# Altium PCB Battery charger.PcbDoc
Units mm, origin at the board's own origin, x right, y up, seen from the top; angles counter-clockwise.
Board outline 33 x 10 mm, 2 copper layers (Top Layer, Bottom Layer); 22 components, 12 nets, 51 pads, 29 vias.
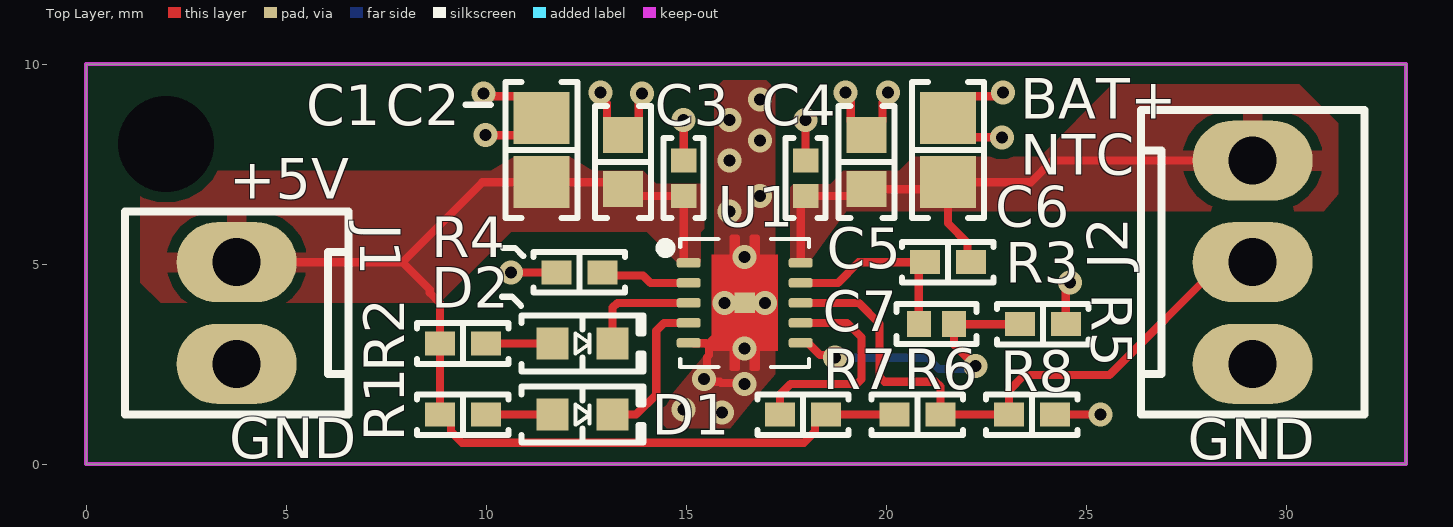
[diagram p0: Top Layer view]
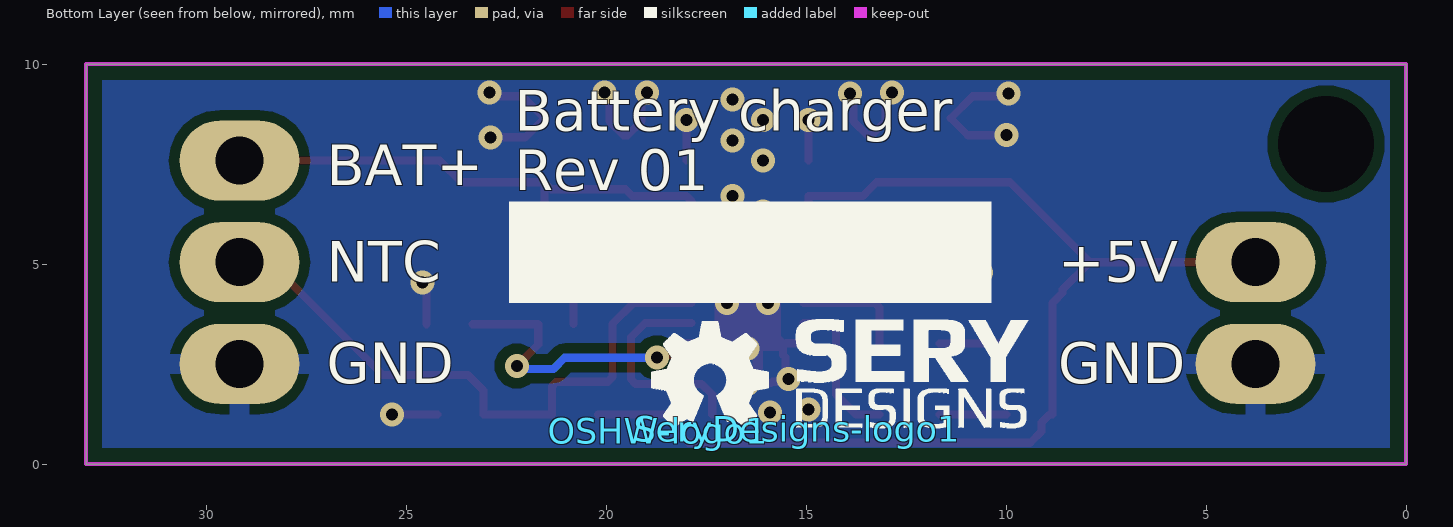
[diagram p1: Bottom Layer view, seen from below]

## Layer stack, top to bottom
Top Solder: solder mask 0.0102, Solder Resist, Dk 3.5
Top Layer: signal copper 0.0356
Dielectric 1: dielectric 0.32, FR-4, Dk 4.8
Bottom Layer: signal copper 0.0356
Bottom Solder: solder mask 0.0102, Solder Resist, Dk 3.5

## Board outline
0,0 0,10 33,10 33,0

## Design rules (kind name [scope] priority, off if disabled: settings)
BoardOutlineClearance [All] p1: gap=0.4 ignorepadtopadclearanceinfootprint=FALSE
Clearance [All] p1: gap=0.254 ignorepadtopadclearanceinfootprint=FALSE except(0: SMDPad-Hole THPad-Hole Via-Hole Fill-Hole Poly-Hole Region-Hole Text-Hole; 0.127: SMDPad-SMDPad; 0.2: Arc-SMDPad Arc-THPad Track-SMDPad Track-THPad; 0.5: SMDPad-THPad THPad-THPad THPad-Via)
HoleSize [All] p1: absolutevalues=TRUE maxlimit=2.54 minlimit=0.3 maxpercent=80.000 minpercent=20.000
HoleToHoleClearance [All] p1: gap=0.5 allowstackedmicrovias=TRUE
MinimumAnnularRing [All] p1: minimumring=0.13
MinimumSolderMaskSliver [All] p1: minsoldermaskwidth=0.12
PolygonConnect [All] p1: connectstyle=Relief reliefconductorwidth=0.254 reliefentries=4 polygonreliefangle="90 Angle" airgapwidth=0.254
RoutingVias [All] p1: holewidth=0.3 width=0.6 viastyle="Through Hole" minholewidth=0.3 minwidth=0.5 maxholewidth=0.6 maxwidth=1
SilkToSilkClearance [All] p1: silktosilkclearance=0
SilkToSolderMaskClearance [IsPad] p1: minsilkscreentomaskgap=0.05 clearancetoexposedcopper=TRUE
SolderMaskExpansion [All] p1: expansion=0.05 istentingtop=FALSE
Width [All] p1: maxlimit=1.016 minlimit=0.127 preferedwidth=0.203
25 further rules are at their usual default settings.

## Components (designator, comment, footprint, x,y, rotation, side; value= is the part's Value field where it differs from the comment)
C1 "10 µF" "CAP 0805_2012" 11.385,7.847 r270 top locked
C2 "1 µF" "CAP 0603_1608" 13.417,7.547 r270 top locked
C3 "0.1 µF" "CAP 0402_1005" 14.941,7.147 r270 top locked
C4 "0.1 µF" "CAP 0402_1005" 17.989,7.147 r270 top locked
C5 "1 µF" "CAP 0603_1608" 19.513,7.547 r270 top locked
C6 "10 µF" "CAP 0805_2012" 21.545,7.847 r270 top locked
C7 "0.47 µF" "CAP 0402_1005" 21.257,3.503 r180 top locked
D1 "Green" "LED 0603_1608 GREEN" 12.413,1.237 r0 top locked (schematic designator LED1)
D2 "Red" "LED 0603_1608 RED" 12.413,3.015 r0 top locked (schematic designator LED2)
J1 "0022272021" "MOLEX KK 0022272021" 3.765,3.777 r90 top locked
J2 "0022272031" "MOLEX KK 0022272031" 29.165,5.047 r270 top locked
OSHW-logo1 "OSHW-logo" OSHW-logo 18.7,0.831 r180 bottom
R1 "1k" "RES 0402_1005" 9.42,1.237 r180 top locked
R2 "1k" "RES 0402_1005" 9.42,3.015 r180 top locked
R3 "220R" "RES 0402_1005" 21.545,5.047 r0 top locked
R4 "49.9k" "RES 0402_1005" 12.334,4.793 r0 top locked
R5 "1k" "RES 0402_1005" 23.916,3.498 r180 top locked
R6 "10k" "RES 0402_1005" 20.783,1.237 r0 top locked
R7 "10k" "RES 0402_1005" 17.922,1.237 r0 top locked
R8 "10k" "RES 0402_1005" 23.644,1.237 r0 top locked
SeryDesigns-logo1 "SeryDesigns-logo" SeryDesigns-logo 15.22,0.881 r180 bottom
U1 "BQ24060" BQ24060-VSON 16.465,4.031 r0 top locked

## Footprints (in the part's own frame and the unit in brackets; to place one, negate y for a bottom-side part, rotate by r counter-clockwise, add the part's x,y. Pads: shape width x height; smd on the part's side, far side on the other; paste and mask are expansions set on the pad)
BQ24060-VSON [mm]
  rrect50% 0.6x0.24 smd mask+0.07: 1(-1.4,1) 2(-1.4,0.5) 3(-1.4,0) 4(-1.4,-0.5) 5(-1.4,-1) 6(1.4,-1) 7(1.4,-0.5) 8(1.4,0) 9(1.4,0.5) 10(1.4,1)
  rect 0.508x0.508 smd paste-2.54 mask-2.54: 11(0,0)
  Top Layer region: -0.375,-1.636 -0.375,-1.2 -0.825,-1.2 -0.825,1.2 -0.375,1.2 -0.375,1.639 -0.375,1.645 -0.373,1.656 -0.368,1.666 -0.362,1.676 -0.358,1.68 -0.358,1.68 -0.355,1.683 -0.351,1.687 -0.342,1.693 -0.331,1.698 -0.319,1.7 -0.314,1.7 -0.314,1.7 -0.188,1.7 -0.182,1.7 -0.17,1.698 -0.159,1.693 -0.148,1.686 -0.144,1.682 -0.144,1.682 -0.14,1.678 -0.137,1.674 -0.131,1.666 -0.127,1.657 -0.125,1.647 -0.125,1.642 -0.125,1.642 -0.125,1.2 0.125,1.2 0.125,1.639 0.125,1.645 0.127,1.656 0.132,1.666 0.138,1.676 0.142,1.68 0.142,1.68 0.146,1.684 0.15,1.688 0.159,1.694 0.169,1.698 0.179,1.7 0.184,1.7 0.184,1.7 0.185,1.7 0.185,1.7 0.312,1.7 0.318,1.7 0.33,1.698 0.342,1.693 0.352,1.686 0.356,1.682 0.361,1.677 0.368,1.667 0.373,1.655 0.375,1.643 0.375,1.637 0.375,1.637 0.375,1.2 0.825,1.2 0.825,1.2 0.825,-1.2 0.375,-1.2 0.375,-1.634 0.375,-1.641 0.372,-1.654 0.367,-1.667 0.359,-1.679 0.354,-1.683 0.354,-1.683 0.354,-1.684 0.35,-1.688 0.341,-1.694 0.331,-1.698 0.32,-1.7 0.315,-1.7 0.315,-1.7 0.185,-1.7 0.179,-1.7 0.169,-1.698 0.158,-1.694 0.149,-1.688 0.146,-1.684 0.146,-1.684 0.141,-1.68 0.137,-1.676 0.131,-1.667 0.127,-1.656 0.125,-1.646 0.125,-1.64 0.125,-1.64 0.126,-1.2 -0.125,-1.199 -0.125,-1.639 -0.125,-1.645 -0.127,-1.656 -0.132,-1.667 -0.138,-1.677 -0.142,-1.681 -0.147,-1.685 -0.158,-1.693 -0.17,-1.697 -0.182,-1.7 -0.189,-1.7 -0.189,-1.7 -0.313,-1.7 -0.319,-1.7 -0.331,-1.698 -0.342,-1.693 -0.352,-1.687 -0.356,-1.682 -0.361,-1.678 -0.368,-1.667 -0.373,-1.655 -0.375,-1.643 -0.375,-1.636
  silkscreen extent -2.11,-1.6 1.61,1.6, body extent -1.5,-1.5 1.5,1.5, height 1
"CAP 0402_1005" [mm] "Chip Capacitor, 2-Leads, Body 1.02x0.51mm, IPC Medium Density"
  rect 0.6x0.64 smd: 1(-0.44,0) 2(0.44,0)
  silkscreen extent -1,-0.5 1,0.5, body extent -0.5,-0.26 0.5,0.26, height 0.52
"CAP 0603_1608" [mm] "Chip Capacitor, 2-Leads, Body 1.60x0.80mm, IPC Medium Density"
  rect 0.9x1 smd: 1(-0.675,0) 2(0.675,0)
  silkscreen extent -1.4,-0.7 1.4,0.7, body extent -0.8,-0.41 0.8,0.41, height 0.82
"CAP 0805_2012" [mm] "Chip Capacitor, 2-Leads, Body 2.00x1.20mm, IPC Medium Density"
  rect 1.3x1.4 smd: 1(-0.8,0) 2(0.8,0)
  silkscreen extent -1.7,-0.9 1.7,0.9, body extent -1,-0.64 1,0.64, height 1.26
"LED 0603_1608 GREEN" [mm] "Chip Diode, 2-Leads, Body 1.60x0.80mm, IPC Medium Density"
  rect 0.8x0.8 smd: 1(-0.75,0) 2(0.75,0)
  silkscreen extent -1.52,-0.7 1.52,0.7, body extent -0.8,-0.4 0.8,0.4, height 0.53
"LED 0603_1608 RED" [mm] "Chip Diode, 2-Leads, Body 1.60x0.80mm, IPC Medium Density"
  rect 0.8x0.8 smd: 1(-0.75,0) 2(0.75,0)
  silkscreen extent -1.52,-0.7 1.52,0.7, body extent -0.8,-0.4 0.8,0.4, height 0.53
"MOLEX KK 0022272021" [mm]
  oval 2x3 hole 1.2: 1(-1.27,0) 2(1.27,0)
  silkscreen extent -2.54,-2.79 2.54,2.79, body extent -2.54,-2.9 2.54,2.9, height 11.7
"MOLEX KK 0022272031" [mm]
  oval 2x3 hole 1.2: 1(-2.54,0) 2(0,0) 3(2.54,0)
  silkscreen extent -3.81,-2.79 3.81,2.79, body extent -3.81,-2.9 3.81,2.9, height 11.7
OSHW-logo [mm] "OSHW logo, no writing"
  silkscreen extent -0.17,0.1 2.77,2.74
"RES 0402_1005" [mm] "Chip Resistor, 2-Leads, Body 1.0x0.5mm, IPC Medium Density"
  rect 0.75x0.6 smd: 1(-0.575,0) 2(0.575,0)
  silkscreen extent -1.14,-0.51 1.14,0.51, body extent -0.5,-0.25 0.5,0.25, height 0.35
SeryDesigns-logo [mm] "Sery designs logo"
  silkscreen extent -0.04,0.02 5.77,2.74

## Part data
C1 C6: library part GRM21BR61H106ME43L, "CAP CER 10UF 50V X5R 0805", Device Package="0805 (2012 Metric)", manufacturer="Murata Electronics", Operating Temperature="-55°C ~ 85°C", Supplier Part Number 1=490-18664-1-ND, Temperature Coefficient=X5R, Tolerance=±20%, Voltage - Rated=50V, Applications="General Purpose", Capacitance="10 µF", componentlink1description=Datasheet, componentlink1url=https://search.murata.co.jp/Ceramy/image/img/A01X/G101/ENG/GRM21BR61H106ME43-01A.pdf, componentlink2description="DigiKey Link", componentlink2url=https://www.digikey.com/en/products/detail/murata-electronics/GRM21BR61H106ME43L/10326317, lastupdated="9/19/2022 1:04:12 PM", Lifecycle Status=Active, Minimum Order=1, Mounting Type="Surface Mount, MLCC", Package / Case="0805 (2012 Metric)", packaging=TapeAndReel, Part Number=GRM21BR61H106ME43L, Part Status=Active, partid=41295, price=0.08, series=GRM, Size / Dimension="0.079\" L x 0.049\" W (2.00mm x 1.25mm)", Supplier 1=DigiKey, Thickness (Max)="0.057\" (1.45mm)"
C2 C5: library part UMK107AB7105KA-T, "CAP CER 1UF 50V X7R 0603", Device Package="0603 (1608 Metric)", manufacturer="Taiyo Yuden", Operating Temperature="-55°C ~ 125°C", Supplier Part Number 1=587-3247-1-ND, Temperature Coefficient=X7R, Tolerance=±10%, Voltage - Rated=50V, Applications="SMPS Filtering", Capacitance="1 µF", componentlink1description=Datasheet, componentlink1url=https://www.yuden.co.jp/productdata/catalog/mlcc01_e.pdf, componentlink2description="DigiKey Link", componentlink2url=https://www.digikey.com/en/products/detail/taiyo-yuden/UMK107AB7105KA-T/3660085, lastupdated="9/19/2022 1:00:51 PM", Lifecycle Status=Active, Minimum Order=1, Mounting Type="Surface Mount, MLCC", Package / Case="0603 (1608 Metric)", packaging=TapeAndReel, Part Number=UMK107AB7105KA-T, Part Status=Active, partid=46688, price=0.04, series=M, Size / Dimension="0.063\" L x 0.031\" W (1.60mm x 0.80mm)", Supplier 1=DigiKey, Thickness (Max)="0.037\" (0.95mm)"
C3 C4: library part CGA2B3X7R1H104M050BB, "CAP CER 0.1UF 50V X7R 0402", Device Package="0402 (1005 Metric)", manufacturer="TDK Corporation", Operating Temperature="-55°C ~ 125°C", Ratings=AEC-Q200, Supplier Part Number 1=445-12271-1-ND, Temperature Coefficient=X7R, Tolerance=±20%, Voltage - Rated=50V, Applications=Automotive, Capacitance="0.1 µF", componentlink1description=Datasheet, componentlink1url=https://product.tdk.com/info/en/catalog/datasheets/mlcc_automotive_general_en.pdf?ref_disty=digikey, componentlink2description="DigiKey Link", componentlink2url=https://www.digikey.com/en/products/detail/tdk-corporation/CGA2B3X7R1H104M050BB/3949507, lastupdated="9/19/2022 12:57:29 PM", Lifecycle Status=Active, Minimum Order=1, Mounting Type="Surface Mount, MLCC", Package / Case="0402 (1005 Metric)", packaging=TapeAndReel, Part Number=CGA2B3X7R1H104M050BB, Part Status=Active, partid=45577, price=0.01, series=CGA, Size / Dimension="0.039\" L x 0.020\" W (1.00mm x 0.50mm)", Supplier 1=DigiKey, Thickness (Max)="0.022\" (0.55mm)"
C7: library part GRM155R61H474KE11D, "CAP CER 0.47UF 50V X5R 0402", Device Package="0402 (1005 Metric)", manufacturer="Murata Electronics", Operating Temperature="-55°C ~ 85°C", Supplier Part Number 1=490-16354-1-ND, Temperature Coefficient=X5R, Tolerance=±10%, Voltage - Rated=50V, Applications="General Purpose", Capacitance="0.47 µF", componentlink1description=Datasheet, componentlink1url=https://search.murata.co.jp/Ceramy/image/img/A01X/G101/ENG/GRM155R61H474KE11-01.pdf, componentlink2description="DigiKey Link", componentlink2url=https://www.digikey.com/en/products/detail/murata-electronics/GRM155R61H474KE11D/7363098, lastupdated="9/19/2022 12:57:29 PM", Lifecycle Status=Active, Minimum Order=1, Mounting Type="Surface Mount, MLCC", Package / Case="0402 (1005 Metric)", packaging=TapeAndReel, Part Number=GRM155R61H474KE11D, Part Status=Active, partid=3640, price=0.02, series=GRM, Size / Dimension="0.039\" L x 0.020\" W (1.00mm x 0.50mm)", Supplier 1=DigiKey, Thickness (Max)="0.022\" (0.55mm)"
D1: library part 5973316507F, "LED GREEN 0603 SMD", Current - Test=20mA, Device Package="0603 (1608 Metric)", Lens Color=1.24mm, manufacturer=Dialight, Millicandela Rating=34mcd, Supplier Device Package=0603, Supplier Part Number 1=350-4373-1-ND, Voltage - Forward (Vf) (Typ)=2V, Color=Green, componentlink1description=Datasheet, componentlink1url=http://www.dialightsignalsandcomponents.com/Assets/Drawings/2D_Drawings_DrawingDetailedSpec/NewDrawings/C18371C.pdf, componentlink2description="DigiKey Link", componentlink2url=https://www.digikey.com/en/products/detail/dialight/5973316507F/9385428, Configuration=Standard, Height (Max)=1.24mm, lastupdated="9/19/2022 1:49:59 PM", Lens Style="Round with Domed Top", Lifecycle Status=Active, Minimum Order=1, Mounting Type="Surface Mount", Package / Case="0603 (1608 Metric)", packaging=TapeAndReel, Part Number=5973316507F, Part Status=Active, partid=587, price=0.12, series=597, Size / Dimension="1.60mm L x 0.80mm W", Supplier 1=DigiKey, Wavelength - Dominant=560nm
D2: library part 19-213/R6C-AP1Q2B/3T, "LED RED CLEAR 2SMD", Current - Test=20mA, Device Package="0603 (1608 Metric)", Lens Color=Colorless, manufacturer="Everlight Electronics Co Ltd", Supplier Device Package=2-SMD, Supplier Part Number 1=1080-1577-2-ND, Voltage - Forward (Vf) (Typ)=2.05V, Color=Red, componentlink2description="DigiKey Link", componentlink2url=https://www.digikey.com/en/products/detail/everlight-electronics-co-ltd/19-213-R6C-AP1Q2B-3T/8535271, Configuration=Standard, Height (Max)=0.70mm, lastupdated="9/19/2022 1:50:25 PM", Lens Size="1.20mm x 0.80mm", Lens Style="Rectangle with Flat Top", Lens Transparency=Clear, Lifecycle Status=Active, Minimum Order=0, Mounting Type="Surface Mount", Package / Case="0603 (1608 Metric)", Part Number=19-213/R6C-AP1Q2B/3T, Part Status=Active, partid=420, price=0, series=-, Size / Dimension="1.60mm L x 0.80mm W", Supplier 1=DigiKey, Viewing Angle=120°, Wavelength - Peak=632nm
J1: "CONN HEADER VERT 2POS 2.54MM", Insulation Color=Natural, manufacturer=Molex, Material Flammability Rating="UL94 V-0", Supplier Part Number 1=WM4111-ND, componentlink1description=Datasheet, componentlink1url=https://www.molex.com/pdm_docs/sd/022272021_sd.pdf, componentlink2description="DigiKey Link", componentlink2url=http://digikey.com/product-detail/en/molex/0022272021/WM4111-ND/1130577, Connector Type=Header, Contact Finish - Mating=Tin, Contact Finish - Post=Tin, Contact Finish Thickness - Mating="100.0µin (2.54µm)", Contact Length - Mating="0.295\" (7.49mm)", Contact Length - Post="0.140\" (3.56mm)", Contact Material=Brass, Contact Shape=Square, Contact Type="Male Pin", Fastening Type="Friction Lock", Insulation Height="0.461\" (11.70mm)", Insulation Material="Polyamide (PA), Nylon", lastupdated="1/12/2020 11:51:43 PM", Lifecycle Status=Active, Minimum Order=1, Mounting Type="Through Hole", Number of Positions=2, Number of Positions Loaded=All, Number of Rows=1, Overall Contact Length="0.560\" (14.22mm)", packaging=Bulk, Part Number=0022272021, Part Status=Active, partid=76, Pitch - Mating="0.100\" (2.54mm)", price=0.27, series="KK 6410", Shrouding="Shrouded - 1 Wall", Style="Board to Cable/Wire", Supplier 1=DigiKey, Termination=Solder
J2: "CONN HEADER VERT 3POS 2.54MM", Insulation Color=Natural, manufacturer=Molex, Material Flammability Rating="UL94 V-0", Supplier Part Number 1=WM4112-ND, componentlink1description=Datasheet, componentlink1url=https://www.molex.com/pdm_docs/sd/022272031_sd.pdf, componentlink2description="DigiKey Link", componentlink2url=http://digikey.com/product-detail/en/molex/0022272031/WM4112-ND/1130578, Connector Type=Header, Contact Finish - Mating=Tin, Contact Finish - Post=Tin, Contact Finish Thickness - Mating="100.0µin (2.54µm)", Contact Length - Mating="0.295\" (7.49mm)", Contact Length - Post="0.140\" (3.56mm)", Contact Material=Brass, Contact Shape=Square, Contact Type="Male Pin", Fastening Type="Friction Lock", Insulation Height="0.461\" (11.70mm)", Insulation Material="Polyamide (PA), Nylon", lastupdated="1/12/2020 11:51:54 PM", Lifecycle Status=Active, Minimum Order=1, Mounting Type="Through Hole", Number of Positions=3, Number of Positions Loaded=All, Number of Rows=1, Overall Contact Length="0.560\" (14.22mm)", packaging=Bulk, Part Number=0022272031, Part Status=Active, partid=77, Pitch - Mating="0.100\" (2.54mm)", price=0.37, series="KK 6410", Shrouding="Shrouded - 1 Wall", Style="Board to Cable/Wire", Supplier 1=DigiKey, Termination=Solder
OSHW-logo1: "OSHW logo, no writing"
R1 R2 R5: library part SFR01MZPF1001, "RES SMD 1K OHM 1% 1/16W 0402", Device Package="0402 (1005 Metric)", manufacturer="Rohm Semiconductor", Operating Temperature="-55°C ~ 155°C", Power (Watts)="0.063W, 1/16W", Ratings=AEC-Q200, Resistance="1 kOhms", Supplier Device Package=0402, Supplier Part Number 1=511-SFR01MZPF1001CT-ND, Temperature Coefficient=±100ppm/°C, Tolerance=±1%, componentlink1description=Datasheet, componentlink1url=https://fscdn.rohm.com/en/products/databook/datasheet/passive/resistor/chip_resistor/sfr-e.pdf, componentlink2description="DigiKey Link", componentlink2url=https://www.digikey.com/en/products/detail/rohm-semiconductor/SFR01MZPF1001/15815170, Composition="Thick Film", Features="Anti-Sulfur, Automotive AEC-Q200", Height - Seated (Max)="0.016\" (0.40mm)", lastupdated="9/19/2022 1:13:48 PM", Lifecycle Status=Active, Minimum Order=1, Number of Terminations=2, Package / Case="0402 (1005 Metric)", packaging=TapeAndReel, Part Number=SFR01MZPF1001, Part Status=Active, partid=59471, price=0.01, series=SFR, Size / Dimension="0.039\" L x 0.020\" W (1.00mm x 0.50mm)", Supplier 1=DigiKey
R3: library part RT0402FRE07220RL, "RES SMD 220 OHM 1% 1/16W 0402", Device Package="0402 (1005 Metric)", manufacturer=Yageo, Operating Temperature="-55°C ~ 155°C", Power (Watts)="0.063W, 1/16W", Resistance="220 Ohms", Supplier Device Package=0402, Supplier Part Number 1=13-RT0402FRE07220RLCT-ND, Temperature Coefficient=±50ppm/°C, Tolerance=±1%, componentlink1description=Datasheet, componentlink1url=https://www.yageo.com/upload/media/product/productsearch/datasheet/rchip/PYu-RT_1-to-0.01_RoHS_L_12.pdf, componentlink2description="DigiKey Link", componentlink2url=https://www.digikey.com/en/products/detail/yageo/RT0402FRE07220RL/1071875, Composition="Thin Film", Height - Seated (Max)="0.014\" (0.35mm)", lastupdated="9/19/2022 1:13:42 PM", Lifecycle Status=Active, Minimum Order=1, Number of Terminations=2, Package / Case="0402 (1005 Metric)", packaging=TapeAndReel, Part Number=RT0402FRE07220RL, Part Status=Active, partid=64852, price=0.01, series=RT, Size / Dimension="0.039\" L x 0.020\" W (1.00mm x 0.50mm)", Supplier 1=DigiKey
R4: library part RT0402FRE0749K9L, "RES SMD 49.9K OHM 1% 1/16W 0402", Device Package="0402 (1005 Metric)", manufacturer=Yageo, Operating Temperature="-55°C ~ 155°C", Power (Watts)="0.063W, 1/16W", Resistance="49.9 kOhms", Supplier Device Package=0402, Supplier Part Number 1=13-RT0402FRE0749K9LCT-ND, Temperature Coefficient=±50ppm/°C, Tolerance=±1%, componentlink1description=Datasheet, componentlink1url=https://www.yageo.com/upload/media/product/productsearch/datasheet/rchip/PYu-RT_1-to-0.01_RoHS_L_12.pdf, componentlink2description="DigiKey Link", componentlink2url=https://www.digikey.com/en/products/detail/yageo/RT0402FRE0749K9L/1072041, Composition="Thin Film", Height - Seated (Max)="0.014\" (0.35mm)", lastupdated="9/19/2022 1:13:39 PM", Lifecycle Status=Active, Minimum Order=1, Number of Terminations=2, Package / Case="0402 (1005 Metric)", packaging=TapeAndReel, Part Number=RT0402FRE0749K9L, Part Status=Active, partid=67324, price=0.01, series=RT, Size / Dimension="0.039\" L x 0.020\" W (1.00mm x 0.50mm)", Supplier 1=DigiKey
R6 R7 R8: library part AC0402FR-0710KL, "RES SMD 10K OHM 1% 1/16W 0402", Device Package="0402 (1005 Metric)", manufacturer=Yageo, Operating Temperature="-55°C ~ 155°C", Power (Watts)="0.063W, 1/16W", Ratings=AEC-Q200, Resistance="10 kOhms", Supplier Device Package=0402, Supplier Part Number 1=YAG3436CT-ND, Temperature Coefficient=±100ppm/°C, Tolerance=±1%, componentlink1description=Datasheet, componentlink1url=https://www.yageo.com/upload/media/product/productsearch/datasheet/rchip/PYu-AC_51_RoHS_L_7.pdf, componentlink2description="DigiKey Link", componentlink2url=https://www.digikey.com/en/products/detail/yageo/AC0402FR-0710KL/5895030, Composition="Thick Film", Features="Automotive AEC-Q200, Moisture Resistant", Height - Seated (Max)="0.015\" (0.37mm)", lastupdated="9/19/2022 1:14:31 PM", Lifecycle Status=Active, Minimum Order=1, Number of Terminations=2, Package / Case="0402 (1005 Metric)", packaging=CutTape, Part Number=AC0402FR-0710KL, Part Status=Active, partid=12029, price=0.01, series=AC, Size / Dimension="0.039\" L x 0.020\" W (1.00mm x 0.50mm)", Supplier 1=DigiKey
SeryDesigns-logo1: "Sery designs logo"
U1: "IC, SMD, Battery Charger, Li-ion 1-Cell, 10VSON", MPN=BQ24060DRCT, Package=VDFN-10, Part Number=710HV0BQ24060, Supplier Part Number 1=296-19867-2-ND, Temp Range="-40°C ~ 85°C (TA)", componentlink1description=Datasheet, componentlink1url=https://www.ti.com/lit/ds/symlink/bq24060.pdf?HQS=dis-dk-null-digikeymode-dsf-pf-null-wwe&ts=1655903, Family=ICs, MF="Texas Instruments", Mount Type=SMT, Supplier 1=Digi-Key

## Free pads (board coordinates)
  round 0 hole 2.4 unplated: 1(2,8)

## Via types
v1: diameter 0.6, hole 0.3, Top Layer to Bottom Layer, tented both sides, 29 vias

## Nets (pads, with @x,y where several pads share a name; then routed paths per layer and width w, separated by ;. In a path a pad name is that pad's centre, name@x,y a point inside that pad or via, vN(x,y) a via of type N, cw(c..) or ccw(c..) an arc to the next point about the centre after c; other vN are vias at no path point)
+5V: C1.2 C2.2 C3.2 J1.2 R1.2 R2.2 R6.1 R7.2 U1.1 | length 30.3
  Top Layer w0.203: J1.2 7.905,5.047 ; U1.1 14.959,5.031 14.941,5.049 C3.2 13.582,6.707 C2.2 13.242,7.047 C1.2 9.905,7.047 7.905,5.047 ; R6.1 18.422,1.237 18.223,1.039 18.223,0.815 17.944,0.535 9.397,0.535 9.118,0.815 9.118,1.039 8.92,1.237 R1.2 R2.2 8.845,4.031 8.591,4.285 8.591,4.361 7.905,5.047
BAT+: C4.2 C5.2 C6.2 J2.1 R3.2 U1.10 | length 15.5
  Top Layer w0.203: U1.10 17.865,6.583 C4.2 19.348,6.707 C5.2 21.37,6.872 C6.2 ; R3.2 22.035,5.132 22.035,5.533 21.545,6.023 C6.2 ; J2.1 24.161,7.587 23.621,7.047 C6.2
BAT_NTC: J2.2 R6.2 R8.1 U1.8 | length 15.6
  Top Layer w0.203: U1.8 19.317,4.031 19.838,3.51 19.838,2.178 19.957,2.059 21.239,2.059 21.358,1.94 R6.2 R8.1 23.069,1.842 23.454,2.228 25.583,2.228 28.403,5.047 J2.2
BAT_SENSE: C7.2 R3.1 U1.9 | length 4.9
  Top Layer w0.203: U1.9 18.793,4.531 19.309,5.047 20.817,5.047 R3.1 20.817,4.894 C7.2
GND: C1.1 C2.1 C3.1 C4.1 C5.1 C6.1 J1.1 J2.3 R4.1 R5.1 R8.2 U1.5 U1.11 | length 21.1
  Top Layer w0.203: v1(9.937,9.263) 10.005,9.195 10.836,9.195 C1.1 10.96,8.222 v1(9.988,8.222) ; v1(10.623,4.793) R4.1 ; v1(12.858,9.289) 12.858,9.181 13.018,9.021 13.018,8.57 13.367,8.222 13.467,8.222 13.815,8.57 13.815,9.072 13.899,9.156 v1(13.899,9.263) ; C3.1 v1(14.941,8.603) ; U1.5 15.488,3.031 15.576,2.943 15.576,2.728 15.519,2.671 15.519,2.21 v1(15.443,2.134) 15.519,2.058 15.843,2.058 15.875,2.026 16.437,2.026 v1(16.465,1.999) ; U1.5@15.176,3.031 15.192,3.015 15.576,3.015 15.957,3.396 v1(15.957,4.031) ; C4.1 v1(17.989,8.603) ; v1(18.979,9.289) 18.979,9.181 19.114,9.046 19.114,8.57 19.463,8.222 19.563,8.222 19.911,8.57 19.911,9.046 20.046,9.181 v1(20.046,9.289) ; v1(22.891,8.171) 22.02,8.171 C6.1 22.093,9.195 22.715,9.195 22.809,9.289 v1(22.916,9.289) ; R8.2 v1(25.355,1.237) ; R5.1 24.491,4.437 v1(24.593,4.539)
  other v1: 15.9,1.295 14.941,1.364 16.465,2.888 16.973,4.031 16.465,5.174 16.084,6.317 16.846,6.698 16.084,7.587 16.846,8.095 16.084,8.603 16.846,9.111
ISET: C7.1 R5.2 U1.6 | length 7.6
  Top Layer w0.203: U1.6 18.045,3.031 18.35,2.725 18.659,2.725 v1(18.725,2.659) ; C7.1 C7.1@21.697,3.498 ; v1(22.23,2.456) 21.697,2.989 C7.1@21.697,3.498 ; R5.2 C7.1@21.697,3.498
  Bottom Layer w0.203: v1(18.725,2.659) 21.037,2.659 21.316,2.38 21.913,2.38 22.154,2.38 v1(22.23,2.456)
NetLED1_1: D1.1 R1.1 | length 1.7
  Top Layer w0.203: R1.1 D1.1
NetLED2_1: D2.1 R2.1 | length 1.7
  Top Layer w0.203: R2.1 D2.1
P\G\: R7.1 U1.7 | length 5.4
  Top Layer w0.203: R7.1 17.347,1.738 17.612,2.004 19.262,2.004 19.381,2.123 19.381,3.172 19.022,3.531 U1.7
STAT1: D2.2 U1.3 | length 2.8
  Top Layer w0.203: D2.2 13.163,3.913 13.282,4.032 U1.3@15.063,4.032
STAT2: D1.2 U1.4 | length 3.8
  Top Layer w0.203: D1.2 13.164,1.239 13.748,1.239 14.255,1.745 14.255,3.336 14.45,3.531 U1.4
TMR: R4.2 U1.2 | length 2.3
  Top Layer w0.203: R4.2 12.985,4.717 13.925,4.717 14.11,4.531 U1.2

## Polygon pours and split planes (outlines as drawn)
GND on Top Layer "GND_L01_P003" (solid, pour order 3): 16.998,9.594 17.227,9.365 17.227,2.253 16.062,0.856 14.56,0.856 14.433,0.983 14.433,1.491 15.703,3.015 15.703,9.365 15.931,9.594
BAT+ on Top Layer "BAT+_L01_P002" (solid, pour order 2): 18.116,5.098 17.608,5.098 17.608,6.927 17.684,7.003 18.598,7.003 18.928,7.333 20.325,7.333 20.681,7.689 23.856,7.689 25.659,9.492 30.333,9.492 31.298,8.527 31.298,6.749 30.943,6.317 19.005,6.317
+5V on Top Layer "+5V_L01_P001" (solid, pour order 1): 1.86,4.031 8.845,4.031 10.115,5.301 10.623,5.809 14.01,5.809 14.769,5.049 15.364,5.049 15.364,5.801 15.449,5.885 15.449,7.007 14.25,7.007 13.925,7.333 12.663,7.333 12.096,7.689 10.699,7.689 10.115,7.333 1.86,7.333 1.352,6.825 1.352,4.539
GND on Bottom Layer "GND_L02_P000" (solid, pour order 0): -0.045,10.127 32.975,10.127 32.975,-0.033 -0.045,-0.033

## Keep-outs
Keep-Out Layer:
  the board outline again, w0.1

## Silkscreen, mask and mechanical layers (free items; w line width, h text height)
Top Overlay:
  lines w0.152: 9.48,8.984 10.115,8.984 ; 10.394,4.183 10.648,4.183 10.877,3.955 ; 10.419,5.403 10.724,5.403 10.927,5.199
  text "BAT+" at 23.348,8.628 h1.02
  text "NTC" at 23.348,7.231 h1.02
  text "+5V" at 3.581,6.629 h1.02
  text "GND" at 3.581,0.152 h1.02
  text "GND" at 27.539,0.119 h1.02
Bottom Overlay:
  rectangle: 10.369,4.031 22.434,6.571
  text "Battery charger" at 22.281,8.332 h1.02
  text "BAT+" at 26.98,6.977 h1.02
  text "Rev 01" at 22.281,6.85 h1.02
  text "+5V" at 8.692,4.564 h1.02
  text "NTC" at 26.98,4.564 h1.02
  text "GND" at 8.692,2.024 h1.02
  text "GND" at 26.98,2.024 h1.02
Board Shape:
  lines w0.025: -0.045,-0.033 32.975,-0.033 32.975,10.127 -0.045,10.127 -0.045,-0.033
Mechanical 15:
  the board outline again, w0.15

## Text inside footprints (layer, text, board x,y; h text height)
U1: Top Assembly "1" at 15.119,5.144 h1.02 r90